# EAGLE board Main (EAGLE 9.2.2)
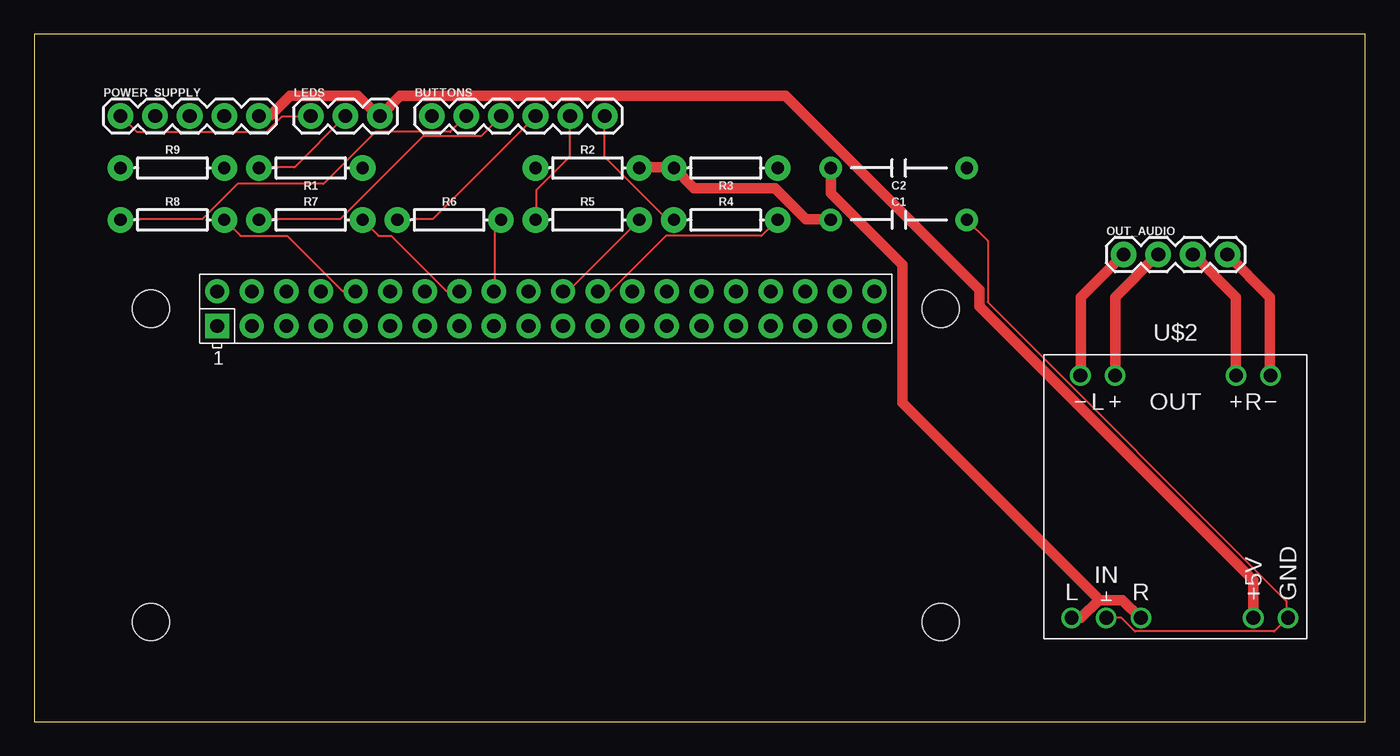
[diagram p0: board, top side]
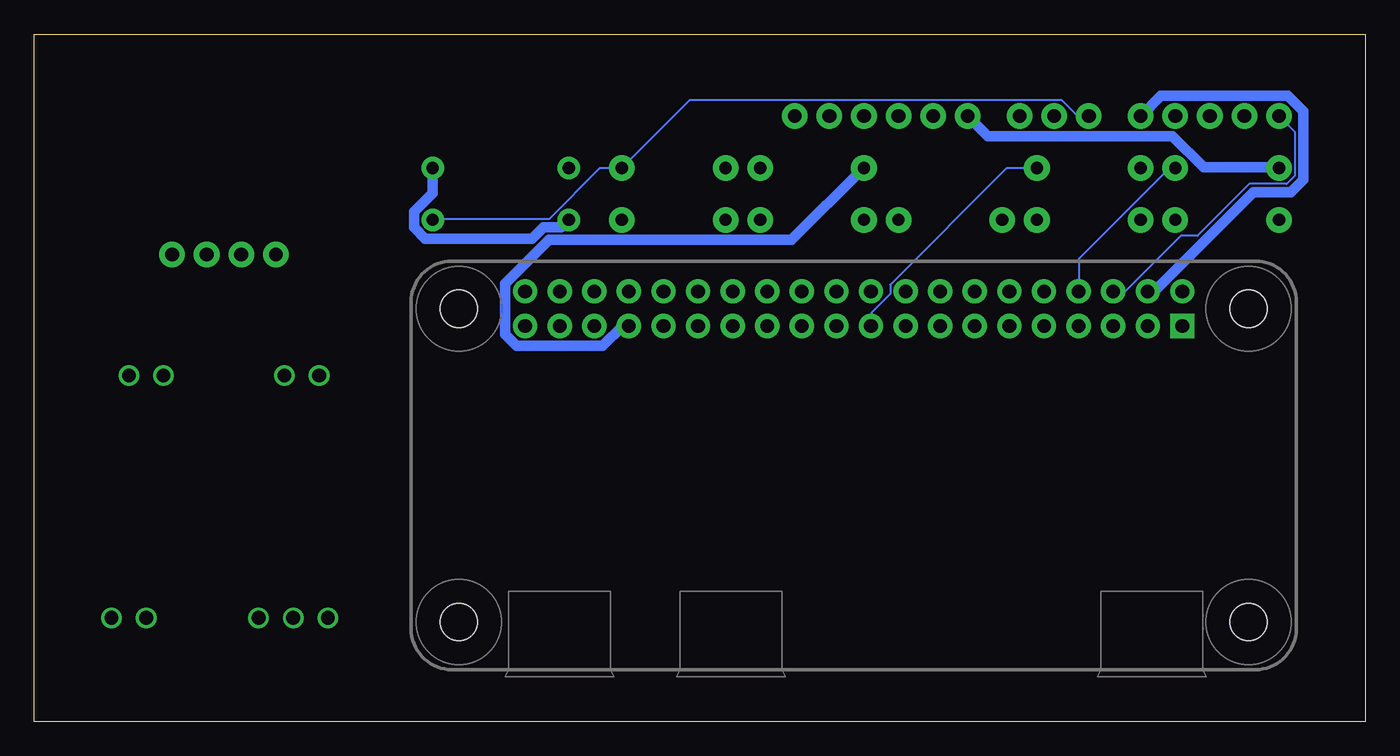
[diagram p1: board, bottom side, seen from below]

Size 97.77 x 50.47 mm. Coordinates in mm from the lower left corner, seen from the top.
Outline: 0,0 97.77,0 97.77,50.47 0,50.47 0,0
Copper layers (1*16): Top 0.035mm / dielectric 1.5mm / Bottom 0.035mm
Design rules "default": minimum track width 6mil, minimum drill 0.35mm, track to track 6mil, track to pad 6mil, pad to pad 6mil, via to via 6mil, smd to smd 6mil, copper to edge 40mil, drill to drill 6mil, minimum pad ring 10mil, minimum via ring 8mil, stop-mask expansion 4mil, vias tented up to drill 0mil, thermal gap 10mil
Net classes: 1 power: width 0.762 mm

## Footprints (pad centres in the part's own frame; a part is rotated, then mirrored left to right if it is on the bottom)
1X06 = drill 1.016 pad 1.88: 1 0,0; 2 2.54,0; 3 5.08,0; 4 7.62,0; 5 10.16,0; 6 12.7,0
CAP-PTH-10MM = drill 0.9 pad 1.651: 1 -5,0; 2 5,0
1X03 = drill 1.016 pad 1.88: 1 0,0; 2 2.54,0; 3 5.08,0
1X04 = drill 1.016 pad 1.88: 1 0,0; 2 2.54,0; 3 5.08,0; 4 7.62,0
1X05 = drill 1.016 pad 1.88: 1 0,0; 2 2.54,0; 3 5.08,0; 4 7.62,0; 5 10.16,0
AXIAL-0.3 = drill 0.9 pad 1.88: P$1 -3.81,0; P$2 3.81,0
RASPBERRYPI_BASTELSTUBE_V13_RASPI_BOARD_B+_FULL = drill 1 pad 1.778 square: 1 8.37,25.23 | drill 1 pad 1.778: 2 8.37,27.77; 3 10.91,25.23; 4 10.91,27.77; 5 13.45,25.23; 6 13.45,27.77; 7 15.99,25.23; 8 15.99,27.77; 9 18.53,25.23; 10 18.53,27.77; 11 21.07,25.23; 12 21.07,27.77; 13 23.61,25.23; 14 23.61,27.77; 15 26.15,25.23; 16 26.15,27.77; 17 28.69,25.23; 18 28.69,27.77; 19 31.23,25.23; 20 31.23,27.77; 21 33.77,25.23; 22 33.77,27.77; 23 36.31,25.23; 24 36.31,27.77; 25 38.85,25.23; 26 38.85,27.77; 27 41.39,25.23; 28 41.39,27.77; 29 43.93,25.23; 30 43.93,27.77; 31 46.47,25.23; 32 46.47,27.77; 33 49.01,25.23; 34 49.01,27.77; 35 51.55,25.23; 36 51.55,27.77; 37 54.09,25.23; 38 54.09,27.77; 39 56.63,25.23; 40 56.63,27.77 | hole 2.75: 3.5,3.5; 3.5,26.5; 61.5,3.5; 61.5,26.5
AMPLIFIER-PAM8403 = drill 1: +5V 5.715,-8.89; GND 8.255,-8.89; IN.COM -5.08,-8.89; IN.L -7.62,-8.89; IN.R -2.54,-8.89; OUT.L+ -4.445,8.89; OUT.L- -6.985,8.89; OUT.R+ 4.445,8.89; OUT.R- 6.985,8.89

## Placement (x,y rotation side)
BUTTONS  [1X06]  29.21,44.45 0 top
C1  33nF  [CAP-PTH-10MM]  63.5,36.83 0 top
C2  10uF  [CAP-PTH-10MM]  63.5,40.64 180 top
LEDS  [1X03]  20.32,44.45 0 top
OUT_AUDIO  [1X04]  80.01,34.29 0 top
POWER_SUPPLY  [1X05]  6.35,44.45 0 top
R1  330  [AXIAL-0.3]  20.32,40.64 180 top
R2  270  [AXIAL-0.3]  40.64,40.64 0 top
R3  150  [AXIAL-0.3]  50.8,40.64 180 top
R4  1k  [AXIAL-0.3]  50.8,36.83 0 top
R5  1k  [AXIAL-0.3]  40.64,36.83 0 top
R6  1k  [AXIAL-0.3]  30.48,36.83 0 top
R7  1k  [AXIAL-0.3]  20.32,36.83 0 top
R8  1k  [AXIAL-0.3]  10.16,36.83 0 top
R9  1k  [AXIAL-0.3]  10.16,40.64 0 top
U$1  RPI-ZERO  [RASPBERRYPI_BASTELSTUBE_V13_RASPI_BOARD_B+_FULL]  5.08,3.81 0 top
U$2  AMPLIFIER-PAM8403  [AMPLIFIER-PAM8403]  83.82,16.51 0 top

## Library data of the parts
BUTTONS = SparkFun-Connectors; PROD_ID: CONN-08437
C1 C2 = SparkFun-Capacitors; PROD_ID: CAP-09321
LEDS POWER_SUPPLY = SparkFun-Connectors
OUT_AUDIO = SparkFun-Connectors; PROD_ID: CONN-09696
R1-R3 = SparkFun-Resistors; PROD_ID: RES-8371
R4-R9 = SparkFun-Resistors; PROD_ID: RES-12182
U$1 = RPI-Zero
U$2 = diy-modules

## Nets
5V [power]: LEDS.3 POWER_SUPPLY.5 U$1.4 U$2.+5V
AMP_E_IN [power]: C2.2 U$2.IN.L U$2.IN.R
AMP_S_IN [power]: R2.P$1 U$1.33
BTN_1: R9.P$2 U$1.8
BTN_2: R8.P$2 U$1.10
BTN_3: R7.P$2 U$1.16
BTN_4: R6.P$2 U$1.18
BTN_5: R5.P$2 U$1.22
BTN_6: R4.P$2 U$1.24
GND-ISO: C1.2 LEDS.1 POWER_SUPPLY.1 R3.P$1 U$1.6 U$2.GND U$2.IN.COM
LED_SIGNAL: R1.P$1 U$1.19
N$1: LEDS.2 R1.P$2
N$2 [power]: OUT_AUDIO.1 U$2.OUT.L-
N$3 [power]: OUT_AUDIO.2 U$2.OUT.L+
N$4 [power]: C1.1 C2.1 R2.P$2 R3.P$2
N$5 [power]: OUT_AUDIO.4 U$2.OUT.R-
N$6 [power]: OUT_AUDIO.3 U$2.OUT.R+
N$7: BUTTONS.6 R4.P$1
N$8: BUTTONS.5 R5.P$1
N$9: BUTTONS.4 R6.P$1
N$10: BUTTONS.3 R7.P$1
N$11: BUTTONS.2 R8.P$1
N$12 [power]: BUTTONS.1 R9.P$1

## Tracks (layer width: path | path; a pad name or v marks a point on that pad's centre or on a via)
5V
  Top 0.762: U$2.+5V 89.53,10.36 69.42,30.48 69.42,31.7 55.17,45.95 26.9,45.95 LEDS.3 25.07,44.65 23.77,45.95 18.82,45.95 17.37,44.5 16.54,44.5 POWER_SUPPLY.5
  Bottom 0.762: POWER_SUPPLY.5 15.01,45.95 5.71,45.95 4.57,44.81 4.57,39.78 5.49,38.86 8.23,38.86 15.47,31.62 15.93,31.62 U$1.4
AMP_E_IN
  Top 0.762: U$2.IN.L 76.89,7.62 78.18,8.91 | 78.18,8.91 79.93,8.91 81.23,7.62 U$2.IN.R | C2.2 58.52,40.62 58.52,38.79 63.78,33.53 63.78,23.39 77.95,9.22 78.18,8.91
AMP_S_IN
  Bottom 0.762: U$1.33 54.1,29.03 54.56,29.03 56.01,27.58 62.33,27.58 63.17,28.42 63.17,32.16 59.97,35.36 42.14,35.36 36.88,40.62 R2.P$1
BTN_1
  Bottom 0.152: U$1.8 21.03,31.62 21.03,33.98 14.4,40.62 14.02,40.62 R9.P$2
BTN_2
  Top 0.152: U$1.10 23.55,31.62 22.63,31.62 18.59,35.66 15.16,35.66 14.02,36.8 R8.P$2
BTN_3
  Top 0.152: R7.P$2 25.3,35.66 26.21,35.66 30.25,31.62 31.17,31.62 U$1.16
BTN_4
  Top 0.152: U$1.18 33.83,31.62 33.83,36.35 34.29,36.8 R6.P$2
BTN_5
  Top 0.152: R5.P$2 39.24,31.62 38.86,31.62 U$1.22
BTN_6
  Top 0.152: U$1.24 41.45,31.62 42.37,31.62 46.41,35.66 53.42,35.66 54.56,36.8 R4.P$2
GND-ISO
  Top 0.152: LEDS.1 20.27,44.42 18.21,44.42 17.07,43.28 7.54,43.28 6.4,44.42 POWER_SUPPLY.1 | U$2.IN.COM 79.86,7.62 80.85,6.63 91.06,6.63 92.05,7.62 U$2.GND 91.97,7.62 91.97,8.84 70.03,30.79 70.03,35.28 68.5,36.8 C1.2
  Bottom 0.152: POWER_SUPPLY.1 5.18,43.28 5.18,40.08 5.79,39.47 8.53,39.47 12.34,35.66 13.56,35.66 17.6,31.62 18.52,31.62 U$1.6 | C1.2 68.43,36.88 59.97,36.88 56.24,40.62 54.63,40.62 R3.P$1 49.61,45.64 22.33,45.64 21.18,44.5 20.34,44.5 LEDS.1
LED_SIGNAL
  Bottom 0.152: U$1.19 36.27,29.11 36.27,30.02 34.9,31.39 34.9,32.08 26.36,40.62 24.16,40.62 R1.P$1
N$1
  Top 0.152: R1.P$2 16.54,40.69 19.13,40.69 22.86,44.42 LEDS.2
N$2
  Top 0.762: OUT_AUDIO.1 76.89,31.17 76.89,25.45 U$2.OUT.L-
N$3
  Top 0.762: U$2.OUT.L+ 79.4,25.45 79.4,31.17 82.53,34.29 OUT_AUDIO.2
N$4
  Top 0.762: C1.1 58.45,36.88 56.69,36.88 54.41,39.17 48.46,39.17 R3.P$2 46.63,40.69 44.5,40.69 R2.P$2
  Bottom 0.762: C2.1 68.5,40.62 68.5,38.79 69.88,37.41 69.88,36.27 69.04,35.43 61.19,35.43 60.35,36.27 59.05,36.27 58.52,36.8 C1.1
N$5
  Top 0.762: OUT_AUDIO.4 90.75,31.17 90.75,25.45 U$2.OUT.R-
N$6
  Top 0.762: U$2.OUT.R+ 88.24,25.45 88.24,31.17 85.11,34.29 OUT_AUDIO.3
N$7
  Top 0.152: BUTTONS.6 41.91,41.45 46.48,36.88 46.94,36.88 R4.P$1
N$8
  Top 0.152: R5.P$1 36.88,36.88 36.88,39.01 39.32,41.45 39.32,44.42 BUTTONS.5
N$9
  Top 0.152: BUTTONS.4 29.26,36.88 26.67,36.88 R6.P$1
N$10
  Top 0.152: R7.P$1 16.54,36.88 22.48,36.88 28.57,42.98 32.84,42.98 34.29,44.42 BUTTONS.3
N$11
  Top 0.152: R8.P$1 6.4,36.88 12.34,36.88 14.94,39.47 21.26,39.47 25.07,43.28 30.56,43.28 31.7,44.42 BUTTONS.2
N$12
  Bottom 0.762: BUTTONS.1 27.74,42.98 14.17,42.98 11.89,40.69 6.4,40.69 R9.P$1